# EAGLE board NeoDigito Grande (EAGLE 9.1.3)
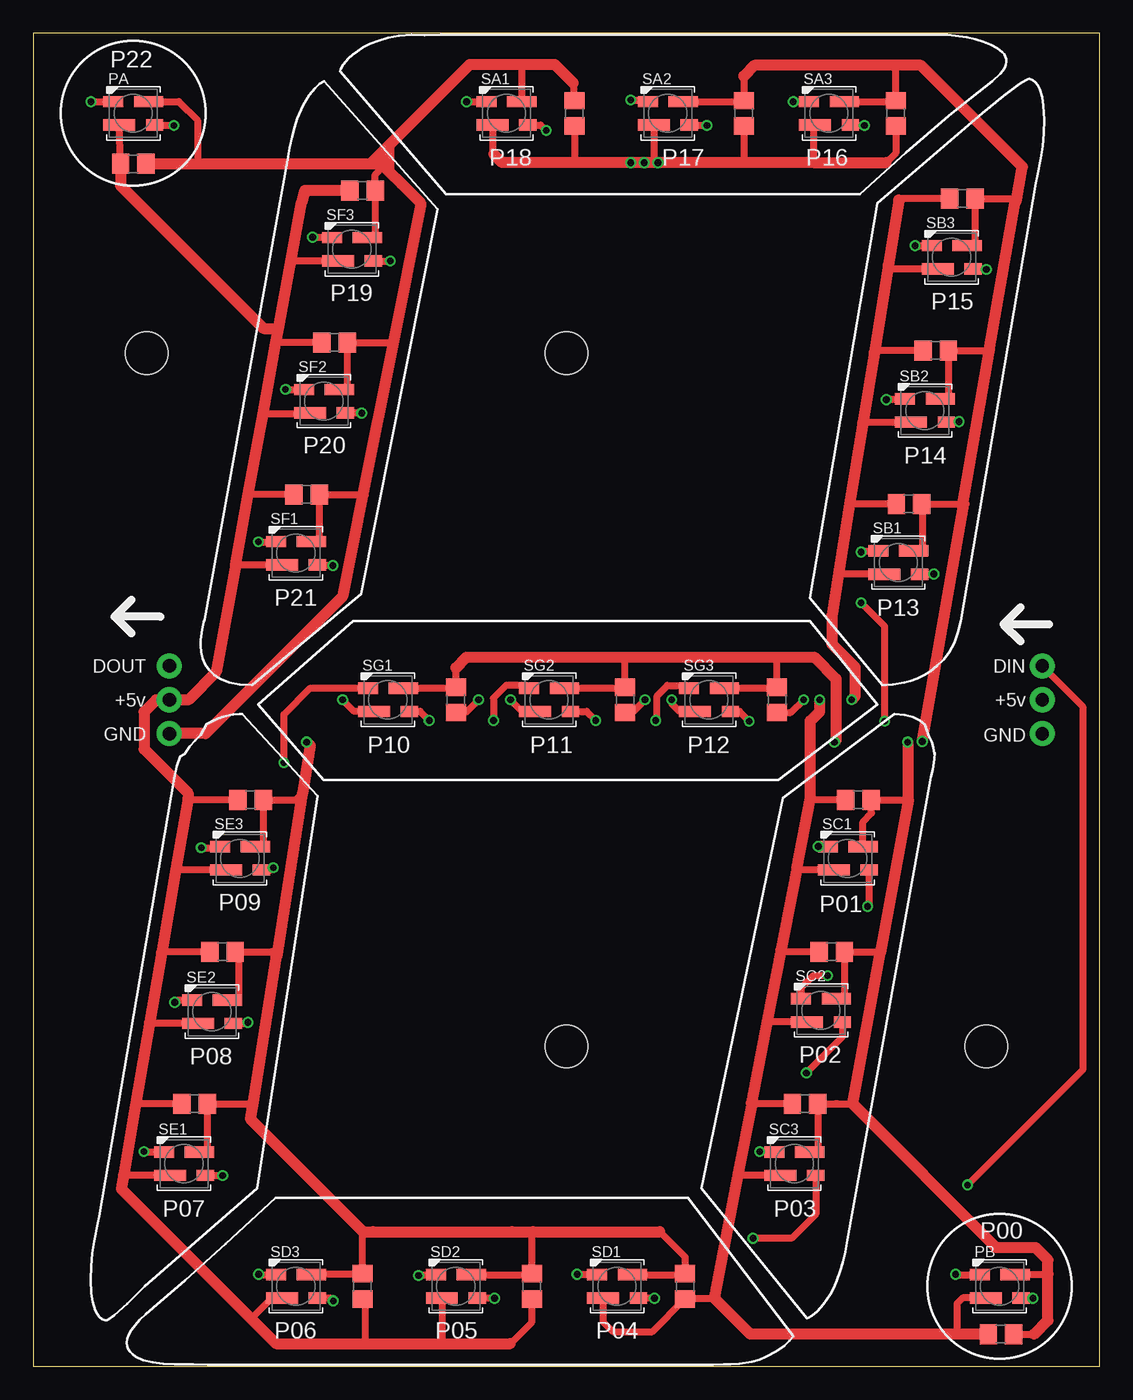
[diagram p0: board, top side]
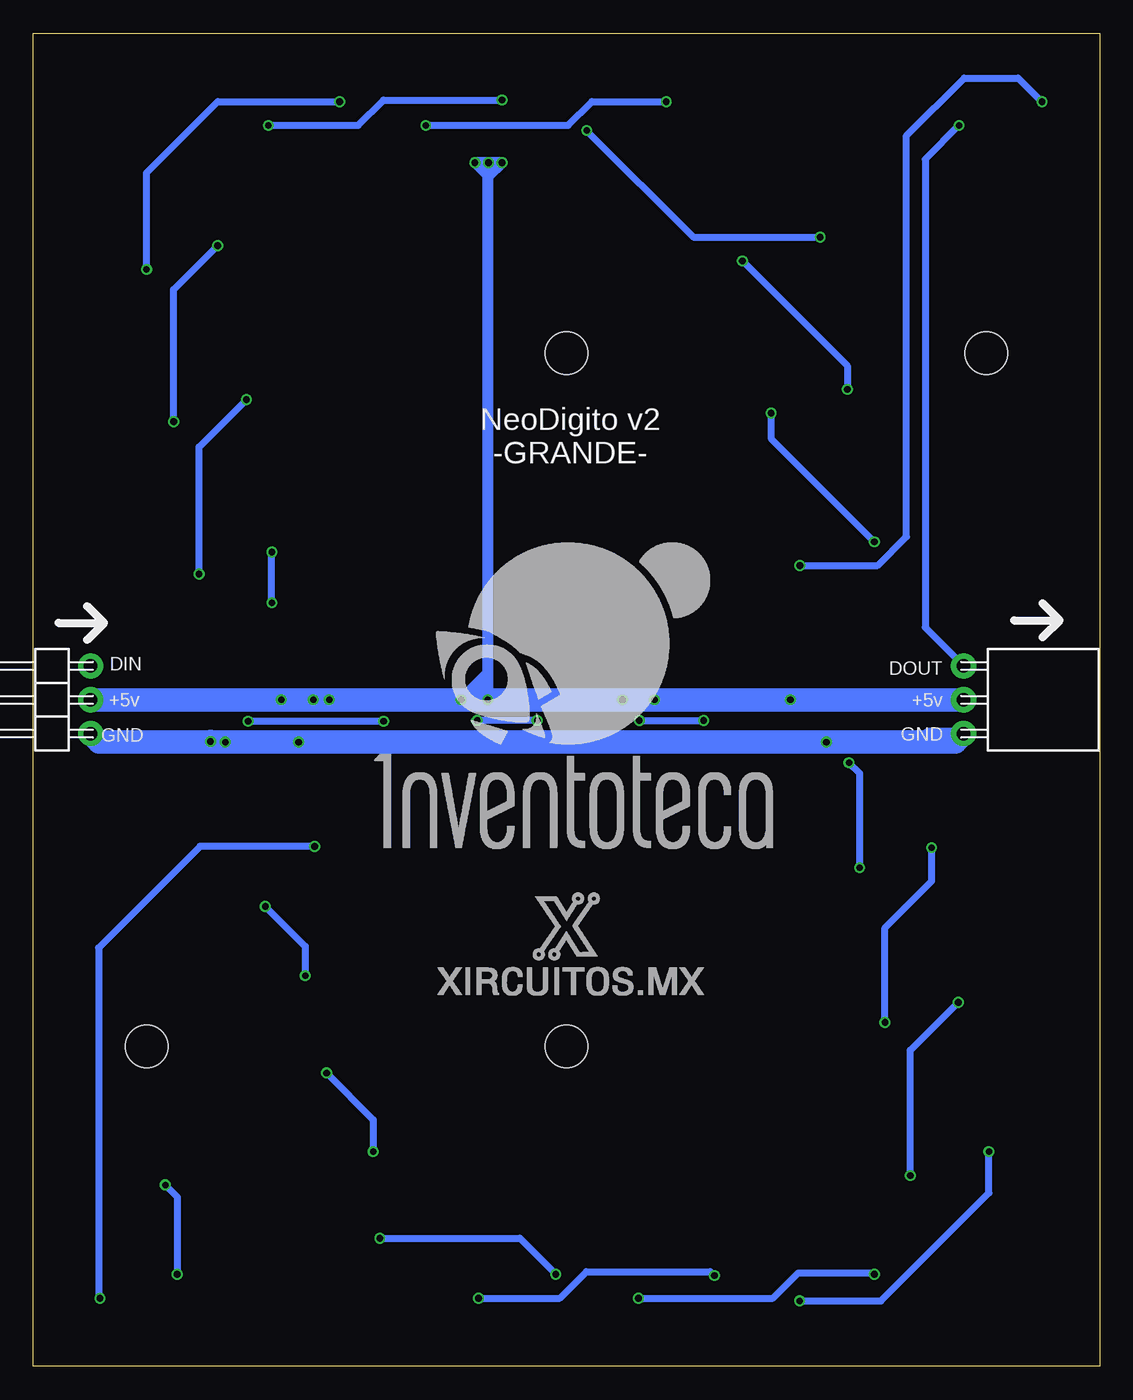
[diagram p1: board, bottom side, seen from below]

Size 80 x 100 mm. Coordinates in mm from the lower left corner, seen from the top.
Outline: 0,0 80,0 80,100 0,100 0,0
Copper layers (1*16): Top 0.035mm / dielectric 1.5mm / Bottom 0.035mm
Design rules "_xircuitos.mx_2L_DRC": minimum track width 6mil, minimum drill 12mil, track to track 6mil, track to pad 6mil, pad to pad 6mil, via to via 6mil, smd to smd 0mil, copper to edge 10mil, drill to drill 12mil, minimum pad ring 10mil, minimum via ring 6mil, stop-mask expansion 2mil, vias tented up to drill 100mil, thermal gap 10mil
Holes 3.2 mm at 40,76 40,24 71.5,24 8.5,76

## Footprints (pad centres in the part's own frame; a part is rotated, then mirrored left to right if it is on the bottom)
C0805 = smd 1.3 x 1.5: 1 -0.95,0; 2 0.95,0
1X03 = drill 1 pad 1.88: 1 -2.54,0; 2 0,0; 3 2.54,0
1X03_NO_SILK = drill 1.016 pad 1.88: 1 -2.54,0; 2 0,0; 3 2.54,0
LED3535 = smd 1.3 x 0.85: 1-DOUT 1.6,-0.875 | smd 2.2 x 0.85: 2-GND 1.15,0.875 | smd 1.5 x 0.85: 3-DIN -1.5,0.875 | smd 2.4 x 0.85: 4-VDD -1.05,-0.875

## Placement (x,y rotation side)
C1  [C0805]  20.5,65.4 180 top
C2  [C0805]  22.6,76.8 180 top
C3  [C0805]  24.7,88.2 180 top
C4  [C0805]  40.6,94 270 top
C5  [C0805]  53.3,94 270 top
C6  [C0805]  64.7,94 270 top
C7  [C0805]  69.7,87.6 180 top
C8  [C0805]  67.7,76.2 180 top
C9  [C0805]  65.7,64.7 180 top
C10  [C0805]  61.9,42.5 180 top
C11  [C0805]  59.9,31.1 180 top
C12  [C0805]  57.9,19.7 180 top
C13  [C0805]  48.9,6 270 top
C14  [C0805]  37.4,6 270 top
C15  [C0805]  24.7,6 270 top
C16  [C0805]  12.1,19.7 180 top
C17  [C0805]  14.2,31.1 180 top
C18  [C0805]  16.3,42.5 180 top
C19  [C0805]  31.7,50 270 top
C20  [C0805]  44.4,50 270 top
C21  [C0805]  55.8,50 270 top
C22  [C0805]  72.6,2.4 180 top
C23  [C0805]  7.5,90.2 180 top
DIN  455-1750-1-ND  [1X03]  75.7,50 270 bottom
DOUT  455-1750-1-ND  [1X03_NO_SILK]  10.2,50 270 bottom
PA  [LED3535]  7.5,94 0 top
PB  [LED3535]  72.5,6 0 top
SA1  [LED3535]  35.5,94 0 top
SA2  [LED3535]  47.6,94 0 top
SA3  [LED3535]  59.7,94 0 top
SB1  [LED3535]  64.9,60.3 0 top
SB2  [LED3535]  66.9,71.7 0 top
SB3  [LED3535]  68.9,83.2 0 top
SC1  [LED3535]  61.1,38.1 0 top
SC2  [LED3535]  59.1,26.7 0 top
SC3  [LED3535]  57.1,15.2 0 top
SD1  [LED3535]  43.8,6 0 top
SD2  [LED3535]  31.7,6 0 top
SD3  [LED3535]  19.7,6 0 top
SE1  [LED3535]  11.3,15.2 0 top
SE2  [LED3535]  13.4,26.6 0 top
SE3  [LED3535]  15.5,38.1 0 top
SF1  [LED3535]  19.7,61 0 top
SF2  [LED3535]  21.8,72.4 0 top
SF3  [LED3535]  23.9,83.8 0 top
SG1  [LED3535]  26.6,50 0 top
SG2  [LED3535]  38.7,50 0 top
SG3  [LED3535]  50.7,50 0 top

## Library data of the parts
C1-C23 = CCV1; SPICEPREFIX: C
DIN = CCV1; PROD_ID: XXX-00000
DOUT PA PB SA1-SA3 SB1-SB3 SC1-SC3 SD1-SD3 SE1-SE3 SF1-SF3 SG1-SG3 = CCV1

## Nets
+5V: C1.2 C2.2 C3.2 C4.2 C5.2 C6.2 C7.2 C8.2 C9.2 C10.2 C11.2 C12.2 C13.2 C14.2 C15.2 C16.2 C17.2 C18.2 C19.2 C20.2 C21.2 C22.2 C23.2 DIN.2 DOUT.2 PA.4-VDD PB.4-VDD SA1.4-VDD SA2.4-VDD SA3.4-VDD SB1.4-VDD SB2.4-VDD SB3.4-VDD SC1.4-VDD SC2.4-VDD SC3.4-VDD SD1.4-VDD SD2.4-VDD SD3.4-VDD SE1.4-VDD SE2.4-VDD SE3.4-VDD SF1.4-VDD SF2.4-VDD SF3.4-VDD SG1.4-VDD SG2.4-VDD SG3.4-VDD
GND: C1.1 C2.1 C3.1 C4.1 C5.1 C6.1 C7.1 C8.1 C9.1 C10.1 C11.1 C12.1 C13.1 C14.1 C15.1 C16.1 C17.1 C18.1 C19.1 C20.1 C21.1 C22.1 C23.1 DIN.3 DOUT.3 PA.2-GND PB.2-GND SA1.2-GND SA2.2-GND SA3.2-GND SB1.2-GND SB2.2-GND SB3.2-GND SC1.2-GND SC2.2-GND SC3.2-GND SD1.2-GND SD2.2-GND SD3.2-GND SE1.2-GND SE2.2-GND SE3.2-GND SF1.2-GND SF2.2-GND SF3.2-GND SG1.2-GND SG2.2-GND SG3.2-GND
N1: DIN.1 PB.3-DIN
N2: PB.1-DOUT SC1.3-DIN
N3: SC3.1-DOUT SD1.3-DIN
N4: SD3.1-DOUT SE1.3-DIN
N5: SE3.1-DOUT SG1.3-DIN
N6: SB1.3-DIN SG3.1-DOUT
N7: SA3.3-DIN SB3.1-DOUT
N8: SA1.1-DOUT SF3.3-DIN
N9: PA.3-DIN SF1.1-DOUT
N10: DOUT.1 PA.1-DOUT
N$2: SA2.3-DIN SA3.1-DOUT
N$3: SA1.3-DIN SA2.1-DOUT
N$5: SB1.1-DOUT SB2.3-DIN
N$6: SB2.1-DOUT SB3.3-DIN
N$7: SC1.1-DOUT SC2.3-DIN
N$8: SC2.1-DOUT SC3.3-DIN
N$9: SD1.1-DOUT SD2.3-DIN
N$10: SD2.1-DOUT SD3.3-DIN
N$11: SG1.1-DOUT SG2.3-DIN
N$12: SG2.1-DOUT SG3.3-DIN
N$13: SE1.1-DOUT SE2.3-DIN
N$14: SE2.1-DOUT SE3.3-DIN
N$16: SF2.3-DIN SF3.1-DOUT
N$17: SF1.3-DIN SF2.1-DOUT

## Tracks (layer width: path | path; a pad name or v marks a point on that pad's centre or on a via)
+5V  (via drill 0.5)
  Top 0.508: PB.4-VDD 69.72,5.12 69.3,4.7 69.3,2.5 69.2,2.4 | C12.2 53.92,19.7 53.9,19.71 53.9,19.72 53.88,19.74 | SC2.4-VDD 55.26,25.82 55.09,26 | SC1.4-VDD 57.4,37.23 57.29,37.33 57.28,37.34 | C11.2 56.19,31.1 56.09,31.2 | C10.2 58.38,42.5 58.31,42.58 | 51.1,5.2 51.05,5.15 50.95,5.05 C13.2 46.45,2.6 43.5,2.6 42.75,3.35 SD1.4-VDD | SC3.4-VDD 53.23,14.32 52.92,14.63 | 35.8,1.7 37.4,3.3 C14.2 | C15.2 24.9,4.85 24.9,1.7 | SD3.4-VDD 17.93,5.12 16.35,3.55 | SD2.4-VDD 30.65,1.85 30.8,1.7 | SE1.4-VDD 6.79,14.32 6.78,14.34 | SE2.4-VDD 8.79,25.73 8.73,25.78 | SE3.4-VDD 10.69,37.23 10.68,37.22 | C18.2 11.7,42.5 11.6,42.6 | C16.2 7.73,19.7 7.7,19.73 | C17.2 9.71,31.1 9.62,31.01 | C21.2 56.85,49.05 v57.8,50 | C20.2 44.94,49.05 v45.89,50 | C19.2 32.45,49.05 v33.4,50 | SG1.4-VDD 24.07,49.12 v23.2,50 | SG2.4-VDD 36.67,49.12 v35.8,50 | SG3.4-VDD 48.48,49.12 47.9,49.7 v47.9,50 | C6.2 64.7,91 64,90.3 | C9.2 61.31,64.7 61.25,64.64 | C8.2 63.23,76.2 63.09,76.06 | C7.2 65.04,87.6 64.94,87.5 | SB3.4-VDD 64.43,82.33 64.15,82.61 | SB2.4-VDD 65.8,70.78 62.24,70.78 | SB1.4-VDD 60.43,59.42 60.41,59.44 | SA3.4-VDD 58.55,93.02 58.55,90.3 | v46.86,90.3 46.55,90.61 SA2.4-VDD | SA1.4-VDD 34.45,91.03 34.54,90.93 | C4.2 40.6,90.39 40.51,90.3 | C5.2 53.3,90.34 53.34,90.3 | C2.2 18.27,76.8 18.19,76.73 | C1.2 16.15,65.4 16.13,65.38 | SF1.4-VDD 18.63,60.11 15.18,60.11 | SF2.4-VDD 20.65,71.43 17.23,71.43 | SF3.4-VDD 19.37,82.92 19.32,82.97 | C23.2 PA.4-VDD
  Top 0.813: 57.29,37.33 58.31,42.58 58.31,48.42 59,49.11 v59,50 | 57.28,37.34 56.09,31.2 55.09,26 53.88,19.74 | 53.9,19.71 52.92,14.63 51.1,5.2 | C22.2 69.2,2.4 53.8,2.4 51.05,5.15 | 35.8,1.7 30.8,1.7 24.9,1.7 18.2,1.7 16.35,3.55 6.6,13.3 6.78,14.34 7.7,19.73 8.73,25.78 9.62,31.01 10.68,37.22 11.6,42.6 11.6,43 8.3,46.3 8.3,49.1 9.2,50 DOUT.2 11.65,50 13.72,52.07 15.18,60.11 16.13,65.38 17.23,71.43 18.19,76.73 18.4,77.85 | 64,90.3 58.55,90.3 54.2,90.3 53.34,90.3 v46.86,90.3 v45.85,90.3 v44.83,90.3 40.51,90.3 35.18,90.3 34.54,90.93 | 64.94,87.5 64.15,82.61 63.09,76.06 62.24,70.78 61.25,64.64 60.41,59.44 59.9,56.3 59.9,54.2 61.65,52.45 61.65,50.25 v61.4,50 | 18.4,77.85 19.32,82.97 20.11,87.32 20.36,88.2 C3.2 | C23.2 6.55,88.57 17.27,77.85 18.4,77.85
  Bottom 0.813: 45.89,89.24 45.89,89.49 45.89,90.26 v45.85,90.3 | 45.89,89.24 45.83,89.3 | 45.83,89.3 46.82,90.3 46.7,90.3 | v46.86,90.3 46.7,90.3 | v45.89,50 45.89,52.32 | 45.89,52.32 45.89,89.24 | 46.7,90.3 v44.83,90.3 45.83,89.3 | v47.9,50 46.54,51.36 | 46.54,51.36 45.89,52.01 45.89,52.32 | 46.74,50 46.54,50.2 46.54,51.36
  Bottom 1.778: DIN.2 v61.4,50 59.7,50 v59,50 v57.8,50 v47.9,50 46.74,50 v45.89,50 v35.8,50 v33.4,50 v23.2,50 DOUT.2
GND  (via drill 0.5)
  Top 0.508: C22.1 75.1,2.4 | PB.2-GND 73.67,6.9 76,6.9 76.13,6.9 | SD3.2-GND 20.93,6.95 C15.1 24.7,10 24.8,10.1 25.49,10.1 | SD2.2-GND 37.33,6.88 C14.1 37.4,10 37.5,10.1 | SD1.2-GND 48.83,6.88 C13.1 48.9,8.2 47,10.1 | SG1.2-GND 31.62,50.88 C19.1 31.7,52.4 | SG2.2-GND 44.33,50.88 C20.1 44.4,53.1 44.3,53.2 | SG3.2-GND 55.73,50.88 C21.1 55.8,53.2 | 61.48,19.69 61.48,19.7 60.2,19.7 | 60.2,19.7 C12.1 58.85,16.35 58.9,16.3 58.67,16.07 SC3.2-GND | 60.2,19.7 60.36,19.7 | 63.57,31.04 63.51,31.1 C11.1 60.85,27.65 60.77,27.57 SC2.2-GND | SC1.2-GND 62.25,40.85 62.9,41.49 62.9,42.55 C10.1 65.64,42.5 65.67,42.47 | 16.43,19.4 16.41,19.42 16.15,19.68 16.13,19.7 C16.1 13.05,16.25 13.1,16.2 12.97,16.07 SE1.2-GND | 18.25,30.72 18.21,30.76 17.93,31.04 17.87,31.1 C17.1 15.4,30.85 15.4,27.5 14.57,27.5 SE2.2-GND | 19.73,42.53 20.17,42.97 | SE3.2-GND 17.07,38.98 17.3,39.2 17.25,39.25 C18.1 19.7,42.5 19.73,42.53 | 53.3,96.8 C5.1 53.23,94.88 SA2.2-GND | C6.1 64.7,95 | 64.7,95 64.7,97.4 64.5,97.6 | SA3.2-GND 64.58,94.88 64.7,95 | 73.75,87.37 73.7,87.43 73.53,87.6 C7.1 70.65,84.15 70.7,84.1 70.67,84.08 SB3.2-GND | 71.73,76.27 71.74,76.27 | 69.72,64.7 69.83,64.7 | SB1.2-GND 66.08,61.2 66.7,61.2 66.7,64.65 C9.1 69.72,64.7 | SB2.2-GND 68.47,72.58 68.7,72.8 68.65,72.85 C8.1 71.66,76.2 71.73,76.27 | 71.71,76.15 71.73,76.17 71.73,76.27 | 65.64,46.78 v65.6,46.83 | 19.73,42.53 20.22,43.02 | 40.51,96.27 40.51,95.04 C4.1 | SA1.2-GND 36.65,97.36 36.96,97.66 36.7,97.66 | 27.02,76.77 26.98,76.8 C2.1 23.55,73.48 23.62,73.41 23.49,73.28 SF2.2-GND | 24.75,65.36 24.71,65.4 C1.1 21.45,61.99 21.46,61.98 21.36,61.88 SF1.2-GND | SF3.2-GND 25.75,84.67 25.78,84.71 25.65,84.84 C3.1 25.65,89.4 26.29,90.04
  Top 0.508: PA.2-GND 10.92,94.88 12.32,93.47 12.32,90.2 | 69.7,64.7 69.72,64.7
  Top 0.813: 75.1,2.4 76.13,3.43 76.13,6.9 76.13,7.97 75.2,8.9 72.27,8.9 61.48,19.69 | 31.7,52.4 32.5,53.2 44.3,53.2 55.8,53.2 58.6,53.2 60.23,51.57 60.23,46.95 v60.1,46.83 | 65.67,42.47 63.57,31.04 | 61.48,19.7 63.57,31.04 | 20.22,43.02 20.77,46.55 v20.5,46.83 | 20.17,42.97 18.25,30.72 | 18.21,30.76 16.43,19.4 | 16.41,19.42 16.27,18.56 24.73,10.1 25.49,10.1 35.9,10.1 37.5,10.1 47,10.1 | v66.7,46.87 69.83,64.7 | 71.71,76.15 69.7,64.7 | 71.74,76.27 73.7,87.43 | 73.75,87.37 74.21,89.99 66.6,97.6 64.5,97.6 54.1,97.6 53.3,96.8 | 65.64,42.5 65.64,46.78 | 12.92,47.46 13.33,47.87 | 13.33,47.87 23.24,57.78 24.75,65.36 27.02,76.77 29.08,87.12 29.08,87.25 27.62,88.71 26.73,89.6 | C23.1 10.67,90.2 12.32,90.2 25.3,90.2 | 25.3,90.2 25.72,90.61 | 25.72,90.61 26.67,91.57 | 26.67,91.57 32.77,97.66 36.32,97.66 36.7,97.66 39.12,97.66 40.51,96.27 | 26.73,89.6 26.29,90.04 | 26.29,90.04 25.72,90.61 | 26.67,91.57 26.67,89.66 26.73,89.6 | 25.3,90.2 26.13,90.2 26.29,90.04 | 13.33,47.87 12.92,47.46 | 12.92,47.46 DOUT.3
  Bottom 0.813: DOUT.3 12.92,47.46
  Bottom 1.778: 67.27,46.83 v65.6,46.83 v60.1,46.83 v20.5,46.83 10.84,46.83 DOUT.3 | 67.27,46.83 75.06,46.83 DIN.3 | 67.27,46.83 66.74,46.83 v66.7,46.87
N1  (via drill 0.5)
  Top 0.508: DIN.1 78.74,49.5 78.74,22.23 70.11,13.6 v70.1,13.6 | v69.2,6.9 69.22,6.88 PB.3-DIN
  Bottom 0.508: v70.1,13.6 69.2,12.7 v69.2,6.9
N2  (via drill 0.5)
  Top 0.508: SC1.3-DIN 58.92,38.98 v58.9,39 | v75,5.1 74.97,5.12 PB.1-DOUT
  Bottom 0.508: v58.9,39 67.5,39 75.1,31.4 75.1,5.2 v75,5.1
N3  (via drill 0.5)
  Top 0.508: SC3.1-DOUT 58.7,11.4 56.9,9.6 v54,9.6 | v40.8,6.9 42.27,6.9 SD1.3-DIN
  Bottom 0.508: v54,9.6 43.5,9.6 v40.8,6.9
N4  (via drill 0.5)
  Top 0.508: SD3.1-DOUT 22.27,5.12 v22.5,4.9 | v8.3,16.1 9.78,16.1 SE1.3-DIN
  Bottom 0.508: v22.5,4.9 16.4,4.9 8.3,13 v8.3,16.1
N5  (via drill 0.5)
  Top 0.508: SE3.1-DOUT 17.82,37.23 v18,37.4 | v18.8,45.27 18.8,48.9 20.77,50.88 SG1.3-DIN
  Bottom 0.508: v18,37.4 18,44.47 v18.8,45.27
N6  (via drill 0.5)
  Top 0.508: SG3.1-DOUT 52.98,49.12 v53.72,48.39 | v63.88,48.39 63.88,55.5 v62.1,57.28 | v62.1,61.09 62.19,61.17 SB1.3-DIN
  Bottom 0.508: v53.72,48.39 v63.88,48.39 | v62.1,57.28 v62.1,61.09
N7  (via drill 0.5)
  Top 0.508: SB3.1-DOUT 71.47,82.33 v71.5,82.3 | v57.02,94.87 v57.03,94.88 SA3.3-DIN
  Bottom 0.508: v71.5,82.3 71.5,89.53 66.17,94.87 v57.02,94.87
N8  (via drill 0.5)
  Top 0.508: SA1.1-DOUT 38.07,93.12 v38.48,92.71 | v20.95,84.71 22.37,84.71 SF3.3-DIN
  Bottom 0.508: v38.48,92.71 30.48,84.71 v20.95,84.71
N9  (via drill 0.5)
  Top 0.508: SF1.1-DOUT 22.43,60.12 v22.48,60.07 | v4.32,94.87 v4.32,94.88 PA.3-DIN
  Bottom 0.508: v22.48,60.07 16.64,60.07 14.48,62.23 14.48,92.33 10.16,96.65 6.1,96.65 v4.32,94.87
N10  (via drill 0.5)
  Top 0.508: PA.1-DOUT 10.51,93.12 v10.54,93.09
  Bottom 0.508: v10.54,93.09 13.08,90.55 13.08,55.42 DOUT.1
N$2  (via drill 0.5)
  Top 0.508: SA3.1-DOUT 61.33,93.09 v62.36,93.09 | v44.83,95 45.98,95 SA2.3-DIN
  Bottom 0.508: v62.36,93.09 55.63,93.09 53.72,95 v44.83,95
N$3  (via drill 0.5)
  Top 0.508: SA2.1-DOUT 50.51,93.12 v50.55,93.09 | v32.51,94.87 v32.52,94.88 SA1.3-DIN
  Bottom 0.508: v50.55,93.09 39.88,93.09 38.1,94.87 v32.51,94.87
N$5  (via drill 0.5)
  Top 0.508: SB1.1-DOUT 67.55,59.42 v67.56,59.44 | v64.01,72.52 64.07,72.58 SB2.3-DIN
  Bottom 0.508: v67.56,59.44 67.56,68.96 v64.01,72.52
N$6  (via drill 0.5)
  Top 0.508: SB2.1-DOUT 69.43,70.83 v69.47,70.87 | v66.17,84.07 v66.17,84.08 SB3.3-DIN
  Bottom 0.508: v69.47,70.87 69.47,80.77 v66.17,84.07
N$7  (via drill 0.5)
  Top 0.508: SC1.1-DOUT 62.7,34.6 v62.6,34.5 | v59.6,29.3 58.5,29.3 57.6,28.4 SC2.3-DIN
  Bottom 0.508: v62.6,34.5 59.6,31.5 v59.6,29.3
N$8  (via drill 0.5)
  Top 0.508: SC2.1-DOUT 60.7,24.7 v58,22 | v54.5,16.1 55.58,16.1 SC3.3-DIN
  Bottom 0.508: v58,22 54.5,18.5 v54.5,16.1
N$9  (via drill 0.5)
  Top 0.508: SD1.1-DOUT 46.58,5.12 v46.6,5.1 | v28.9,6.8 28.98,6.88 SD2.3-DIN
  Bottom 0.508: v46.6,5.1 40.5,5.1 38.5,7.1 29.2,7.1 v28.9,6.8
N$10  (via drill 0.5)
  Top 0.508: SD2.1-DOUT 34.58,5.12 v34.6,5.1 | v16.9,6.9 16.93,6.88 SD3.3-DIN
  Bottom 0.508: v34.6,5.1 24.5,5.1 22.6,7 17,7 v16.9,6.9
N$11  (via drill 0.5)
  Top 0.508: v29.7,48.45 29.02,49.12 SG1.1-DOUT | v34.53,48.45 34.53,50.13 35.48,51.08 37,51.08 SG2.3-DIN
  Bottom 0.508: v34.53,48.45 v29.7,48.45
N$12  (via drill 0.5)
  Top 0.508: SG2.1-DOUT 41.52,49.12 v42.2,48.45 | SG3.3-DIN 49,51.08 47.58,51.08 46.8,50.3 46.8,48.55 v46.7,48.45
  Bottom 0.508: v42.2,48.45 v46.7,48.45
N$13  (via drill 0.5)
  Top 0.508: SE1.1-DOUT 14.18,14.32 v14.2,14.3 | v10.6,27.3 10.78,27.48 SE2.3-DIN
  Bottom 0.508: v14.2,14.3 14.2,23.7 v10.6,27.3
N$14  (via drill 0.5)
  Top 0.508: SE2.1-DOUT 16.02,25.73 v16.1,25.8 | v12.6,38.9 13.93,38.9 SE3.3-DIN
  Bottom 0.508: v16.1,25.8 16.1,32.9 12.6,36.4 v12.6,38.9
N$16  (via drill 0.5)
  Top 0.508: SF3.1-DOUT v26.79,82.92 v26.8,82.93 | v18.92,73.28 SF2.3-DIN
  Bottom 0.508: v26.8,82.93 18.92,75.06 v18.92,73.28
N$17  (via drill 0.5)
  Top 0.508: SF2.1-DOUT 24.61,71.53 v24.64,71.5 | v16.89,61.85 18.17,61.85 SF1.3-DIN
  Bottom 0.508: v24.64,71.5 24.64,69.6 v16.89,61.85

## Text on the board
tPlace: P22 | P18 | P17 | P16 | P19 | P15 | P20 | P14 | P21 | P13 | DOUT | DIN | +5v | +5v | GND | GND | P10 | P11 | P12 | P09 | P01 | P08 | P02 | P07 | P03 | P00 | P06 | P05 | P04
bPlace: NeoDigito v2 / -GRANDE- | +5v | +5v | GND | GND
tDocu: A | B | F | G | E | C | D